# Altium PCB Volts Sample.PcbDoc
Units mil, origin at the board's own origin, x right, y up, seen from the top; angles counter-clockwise.
Board outline 2100 x 1000 mil, 2 copper layers (Top Layer, Bottom Layer); 25 components, 19 nets, 72 pads, 4 vias.
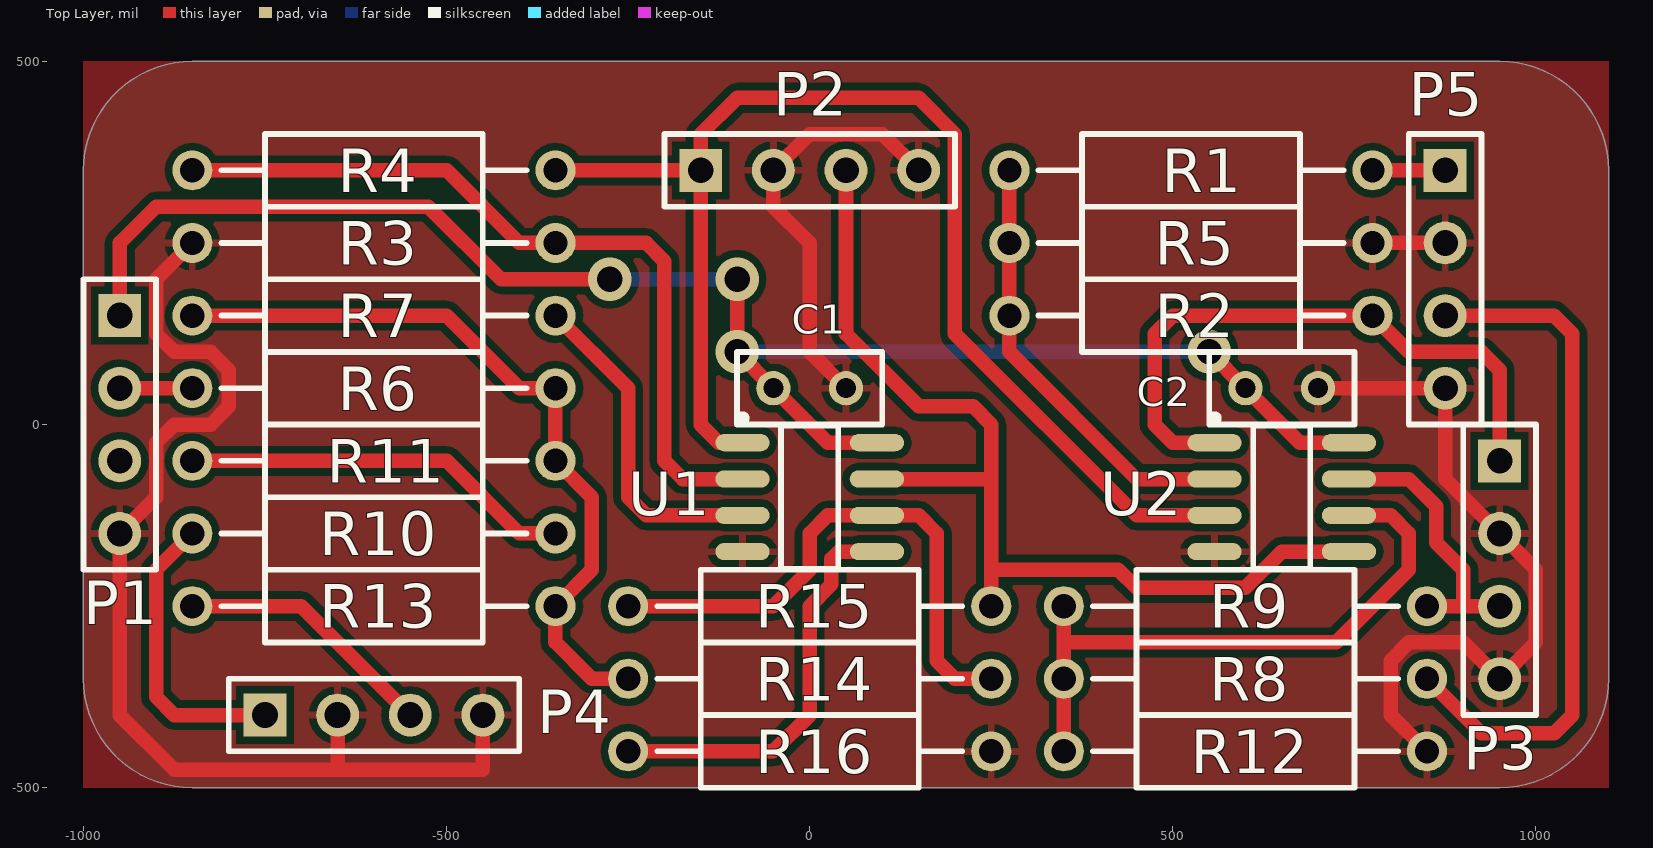
[diagram p0: Top Layer view]
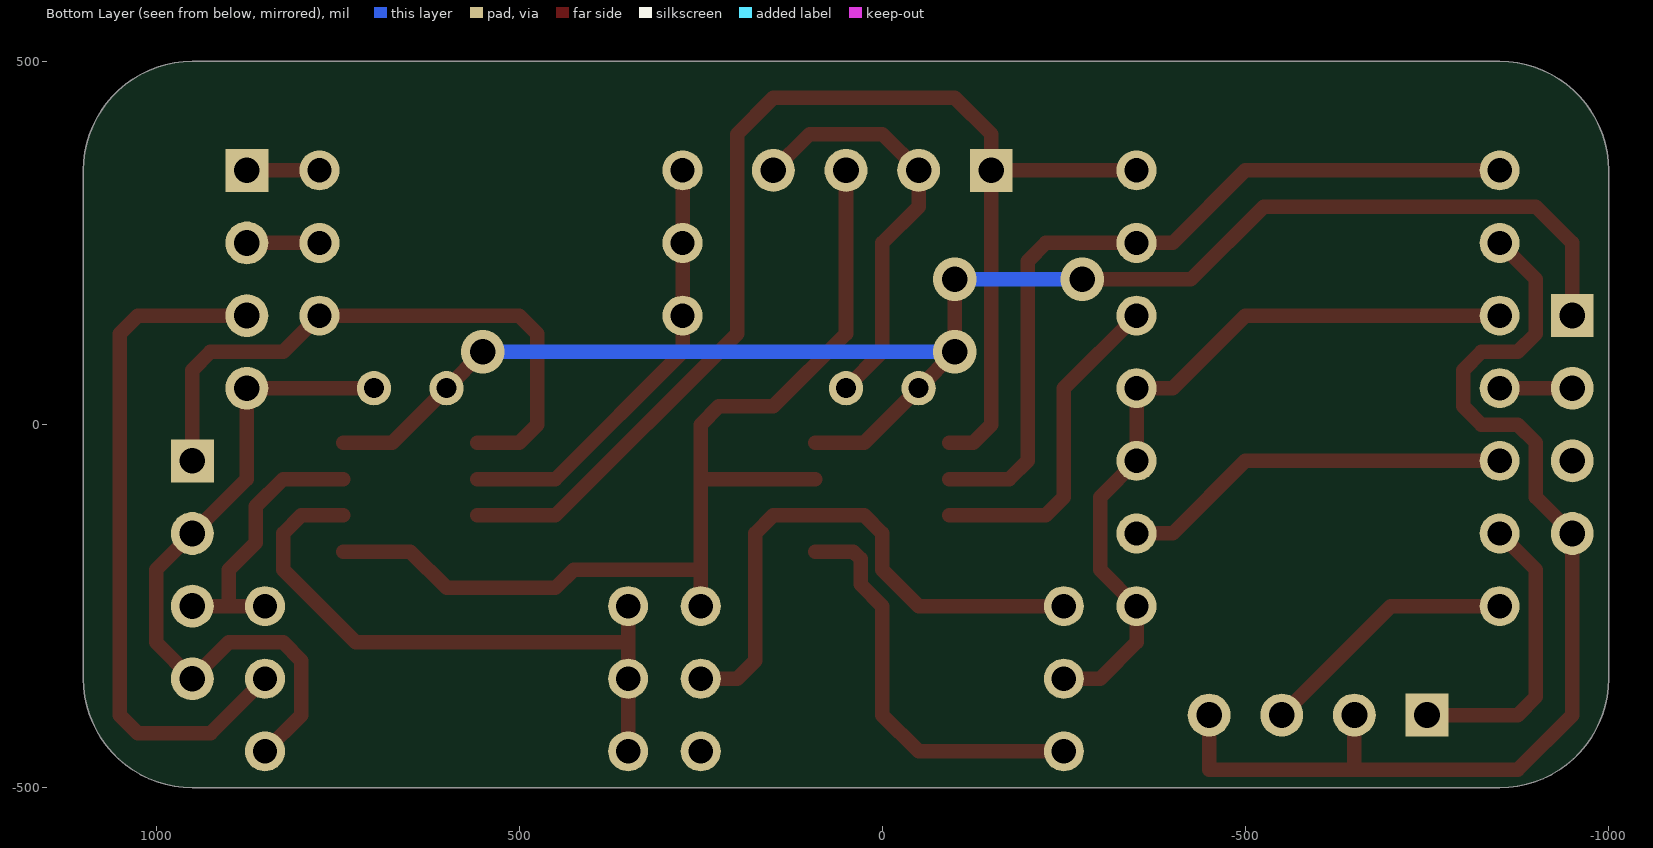
[diagram p1: Bottom Layer view, seen from below]

## Layer stack, top to bottom
Top Layer: signal copper 1.4
Dielectric: dielectric 12.6, FR-4, Dk 4.8
Bottom Layer: signal copper 1.4

## Board outline
-1000,-350 -1000,350 cw(c-850,350) -850,500 950,500 cw(c950,350) 1100,350 1100,-350 cw(c950,-350) 950,-500 -850,-500 cw(c-850,-350)

## Design rules (kind name [scope] priority, off if disabled: settings)
Clearance [All] p1: gap=10
PolygonConnect [All] p1: connectstyle=Relief reliefconductorwidth=10 reliefentries=4 polygonreliefangle="90 Angle" airgapwidth=10
RoutingVias [All] p1: holewidth=35 width=60 viastyle="Through Hole" minholewidth=28 minwidth=50 maxholewidth=200 maxwidth=250
SolderMaskExpansion [All] p1: expansion=4
Width [All] p1: maxlimit=1000 minlimit=10 preferedwidth=10
28 further rules are at their usual default settings.

## Components (designator, comment, footprint, x,y, rotation, side; value= is the part's Value field where it differs from the comment)
C1 "100nF" RAD-0.1 0,50 r0 top
C2 "100nF" RAD-0.1 650,50 r0 top
P1 "Header 4" HDR1X4 -950,150 r270 top
P2 "Header 4" HDR1X4 -150,350 r0 top
P3 "Header 4" HDR1X4 950,-50 r270 top
P4 "Header 4" HDR1X4 -750,-400 r0 top
P5 "Header 4" HDR1X4 875,350 r270 top
R1 "10k" AXIAL-0.5 525,350 r180 top
R2 "100k" AXIAL-0.5 525,150 r0 top
R3 "10k" AXIAL-0.5 -600,250 r0 top
R4 "59k" AXIAL-0.5 -600,350 r0 top
R5 "100k" AXIAL-0.5 525,250 r180 top
R6 "10M" AXIAL-0.5 -600,50 r0 top
R7 "10k" AXIAL-0.5 -600,150 r0 top
R8 "10k" AXIAL-0.5 600,-350 r180 top
R9 "100k" AXIAL-0.5 600,-250 r0 top
R10 "1M" AXIAL-0.5 -600,-150 r0 top
R11 "100K" AXIAL-0.5 -600,-50 r0 top
R12 "100k" AXIAL-0.5 600,-450 r180 top
R13 "40k" AXIAL-0.5 -600,-250 r0 top
R14 "10k" AXIAL-0.5 0,-350 r0 top
R15 "39k" AXIAL-0.5 0,-250 r0 top
R16 "10k" AXIAL-0.5 0,-450 r180 top
U1 "MCP6L02" SO-8 0,-100 r0 top
U2 "MCP6L02" SO-8 650,-100 r0 top

## Footprints (in the part's own frame and the unit in brackets; to place one, negate y for a bottom-side part, rotate by r counter-clockwise, add the part's x,y. Pads: shape width x height; smd on the part's side, far side on the other; paste and mask are expansions set on the pad)
AXIAL-0.5 [mm] "Axial Device, Thru-Hole; 2 Leads; 0.5 in Pin Spacing"
  round 1.4 hole 0.85: 1(-6.35,0) 2(6.35,0)
  silkscreen extent -5.33,-1.27 5.33,1.27
HDR1X4 [mm] "Connector; Header; 4 Position"
  rect 1.5x1.5 hole 0.9: 1(0,0)
  round 1.5 hole 0.9: 2(2.54,0) 3(5.08,0) 4(7.62,0)
  silkscreen extent -1.27,-1.27 8.89,1.27
RAD-0.1 [mm] "Radial Cap, Thru-Hole; 2 Leads; 0.1 in Pin Spacing"
  round 1.2 hole 0.7: 1(-1.27,0) 2(1.27,0)
  silkscreen extent -2.54,-1.27 2.54,1.27
SO-8 [mm] "SOIC, 8-Leads, Body 4.9x3.9mm, Pitch 1.27mm, IPC High Density"
  oval 1.9x0.6 smd: 1(-2.35,1.905) 2(-2.35,0.635) 3(-2.35,-0.635) 4(-2.35,-1.905) 5(2.35,-1.905) 6(2.35,-0.635) 7(2.35,0.635) 8(2.35,1.905)
  silkscreen extent -2.47,-2.5 1,2.88, body extent -2.9,-2.45 3.1,2.45, height 1.75

## Part data
C1 C2: library part CAP, "CAPACITOR SMD 0603"
P1 P2 P3 P4 P5: "Header, 4-Pin"
R1 R3 R7 R8 R14 R16: library part "RES SMD 0603 10k", "RESISTOR SMD 0603 10k"
R2 R4 R5 R6 R9 R10 R11 R12 R13 R15: library part "RES SMD 0603 39k", "RESISTOR SMD 0603 39k"

## Via types
v1: diameter 60, hole 35, Top Layer to Bottom Layer, 4 vias

## Nets (pads, with @x,y where several pads share a name; then routed paths per layer and width w, separated by ;. In a path a pad name is that pad's centre, name@x,y a point inside that pad or via, vN(x,y) a via of type N, cw(c..) or ccw(c..) an arc to the next point about the centre after c; other vN are vias at no path point)
GND: C1.2 C2.2 P1.4 P2.2 P2.4 P3.2 P3.4 P4.2 P4.4 P5.2 P5.4 R3.1 R5.1 R12.1 R16.1 U1.4 U2.4 | length 3171
  Top Layer w20: R3.1 -900,200 -900,125 -875,100 -825,100 -800,75 -800,25 -825,0 -875,0 -900,-25 -900,-100 P1.4 -950,-400 -875,-475 -650,-475 ; P4.2 -650,-475 ; P4.4 -450,-475 -650,-475 ; C1.2 0,100 0,250 -50,300 P2.2 0,400 100,400 P2.4 ; C2.2 P5.4 875,-75 P3.2 1000,-200 1000,-300 P3.4 900,-300 825,-300 800,-325 800,-400 R12.1 ; R5.1 P5.2
K0_1: P5.1 R1.1 | length 100
  Top Layer w20: R1.1 P5.1
K0_2: P5.3 R8.1 | length 951.8
  Top Layer w20: R8.1 925,-425 1025,-425 1050,-400 1050,125 1025,150 P5.3
NetP4_1: P4.1 R10.1 | length 406.1
  Top Layer w20: R10.1 -900,-200 -900,-375 -875,-400 P4.1
NetP4_3: P4.3 R13.1 | length 362.1
  Top Layer w20: R13.1 -700,-250 P4.3
NetR1_2: R1.2 R2.1 R5.2 U2.2 | length 605
  Top Layer w20: R1.2 R5.2 R2.1 275,100 450,-75 U2.2
NetR3_2: R3.2 R4.1 U1.2 | length 1094.6
  Top Layer w20: R4.1 -500,350 -400,250 R3.2 -225,250 -200,225 -200,-50 -175,-75 U1.2
NetR6_2: R6.2 R7.1 R11.2 R13.2 R14.1 | length 1053.6
  Top Layer w20: R7.1 -500,150 -400,50 R6.2 R11.2 -300,-100 -300,-200 R13.2 -350,-300 -300,-350 R14.1
NetR7_2: R7.2 U1.3 | length 459.3
  Top Layer w20: R7.2 -250,50 -250,-100 -225,-125 U1.3
NetR8_2: R8.2 R9.1 R12.2 U2.6 | length 859.3
  Top Layer w20: R12.2 R8.2 350,-300 ; R9.1 350,-300 ; U2.6 800,-125 825,-150 825,-200 725,-300 350,-300
NetR10_2: R10.2 R11.1 | length 541.4
  Top Layer w20: R11.1 -500,-50 -400,-150 R10.2
NetR14_2: R14.2 R15.1 U1.6 | length 776.8
  Top Layer w20: R15.1 -50,-250 0,-200 0,-150 25,-125 U1.6 150,-125 175,-150 175,-325 200,-350 R14.2
NetR16_2: R16.2 U1.5 | length 564.8
  Top Layer w20: R16.2 -50,-450 0,-400 0,-250 30,-220 30,-185 40,-175 U1.5
V+: P2.1 R4.2 U1.1 U2.3 | length 1795.3
  Top Layer w20: R4.2 P2.1 ; U1.1 -125,-25 -150,0 P2.1 ; U2.3 450,-125 200,125 200,400 150,450 -100,450 -150,400 P2.1
V-: P2.3 R15.2 U1.7 U2.5 | length 1407.8
  Top Layer w20: P2.3 50,125 150,25 225,25 250,0 250,-75 ; U1.7 250,-75 ; R15.2 250,-200 ; U2.5 650,-175 600,-225 450,-225 425,-200 250,-200 ; 250,-200 250,-75
VCC: C1.1 C2.1 P1.1 U1.8 U2.8 | length 2225.7
  Top Layer w20: P1.1 -950,250 -900,300 -525,300 -425,200 v1(-275,200) ; v1(-100,100) C1.1 25,-25 U1.8 ; v1@-100,125 v1(-100,200) ; v1(550,100) C2.1 675,-25 U2.8
  Bottom Layer w20: v1(-275,200) v1(-100,200) ; v1(-100,100) v1(550,100)
VIN: P1.2 R6.1 | length 100
  Top Layer w20: P1.2 R6.1
VOUT+: P3.1 R2.2 U2.1 | length 859.3
  Top Layer w20: U2.1 500,-25 475,0 475,125 500,150 R2.2 825,100 925,100 950,75 P3.1
VOUT-: P3.3 R9.2 U2.7 | length 388.5
  Top Layer w20: U2.7 825,-75 862.5,-112.5 862.5,-162.5 900,-200 900,-250 ; R9.2 900,-250 ; P3.3 900,-250
pads on no net: P1.3

## Polygon pours and split planes (outlines as drawn)
GND on Top Layer "Mechanical 1-No Net" (solid, remove dead copper, pour order 2): -1000,-500 -1000,500 1100,500 1100,-500

## Silkscreen, mask and mechanical layers (free items; w line width, h text height)
Mechanical 1:
  the board outline again, w10